# EAGLE board ECU_Adapterplatine (EAGLE 7.7.0)
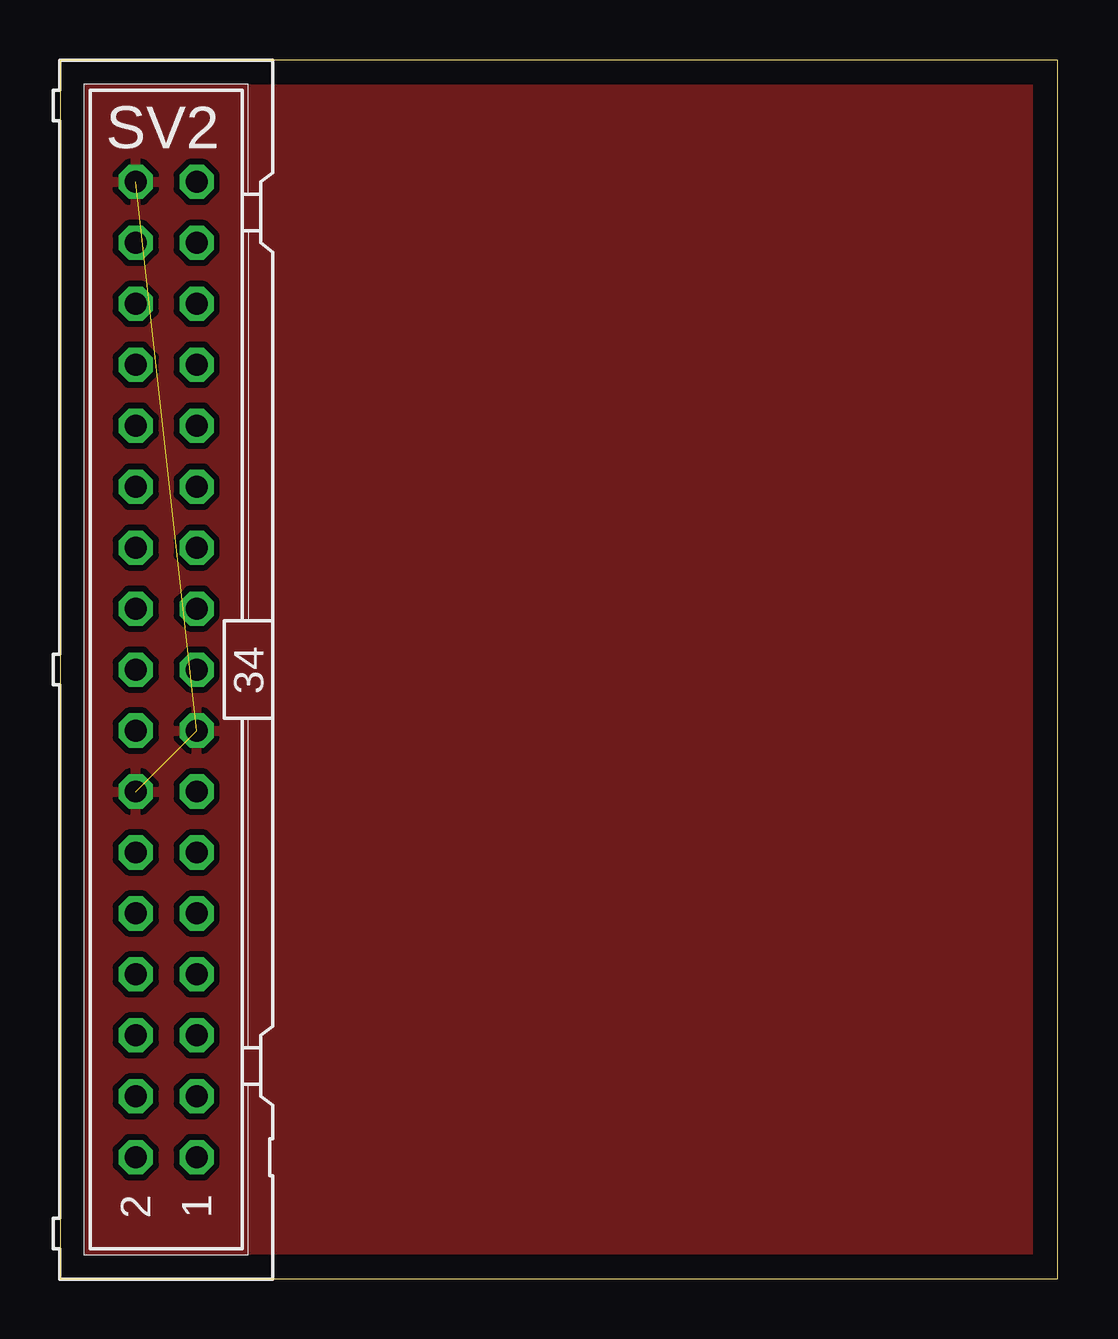
[diagram p0: board, top side]
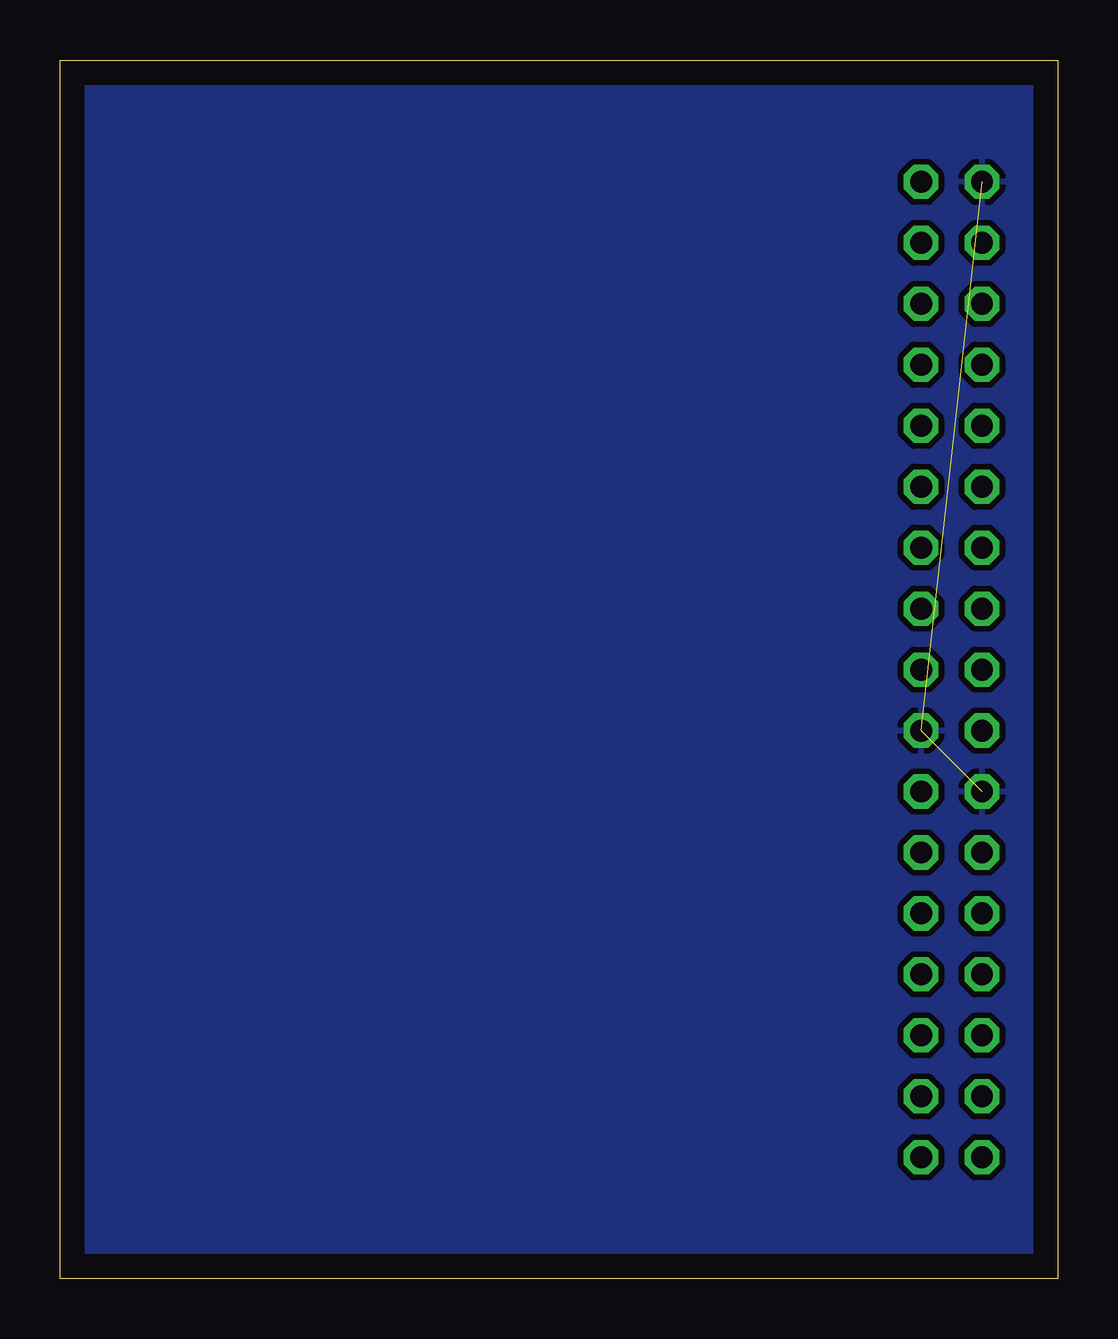
[diagram p1: board, bottom side, seen from below]

Size 41.57 x 50.79 mm. Coordinates in mm from the lower left corner, seen from the top.
Outline: 41.57,50.79 0,50.79 0,0 41.57,0 41.57,50.79
Copper layers (1*16): Top 0.035mm / dielectric 1.5mm / Bottom 0.035mm
Design rules "default": minimum track width 10mil, minimum drill 24mil, track to track 8mil, track to pad 8mil, pad to pad 8mil, via to via 8mil, smd to smd 8mil, copper to edge 40mil, drill to drill 8mil, minimum pad ring 10mil, minimum via ring 8mil, stop-mask expansion 4mil, vias tented up to drill 0mil, thermal gap 10mil

## Footprints (pad centres in the part's own frame; a part is rotated, then mirrored left to right if it is on the bottom)
ML34 = drill 0.914 octagon: 1 -20.32,-1.27; 2 -20.32,1.27; 3 -17.78,-1.27; 4 -17.78,1.27; 5 -15.24,-1.27; 6 -15.24,1.27; 7 -12.7,-1.27; 8 -12.7,1.27; 9 -10.16,-1.27; 10 -10.16,1.27; 11 -7.62,-1.27; 12 -7.62,1.27; 13 -5.08,-1.27; 14 -5.08,1.27; 15 -2.54,-1.27; 16 -2.54,1.27; 17 0,-1.27; 18 0,1.27; 19 2.54,-1.27; 20 2.54,1.27; 21 5.08,-1.27; 22 5.08,1.27; 23 7.62,-1.27; 24 7.62,1.27; 25 10.16,-1.27; 26 10.16,1.27; 27 12.7,-1.27; 28 12.7,1.27; 29 15.24,-1.27; 30 15.24,1.27; 31 17.78,-1.27; 32 17.78,1.27; 33 20.32,-1.27; 34 20.32,1.27

## Placement (x,y rotation side)
SV2  [ML34]  4.43,25.39 90 top

## Library data of the parts
SV2 = con-harting-ml

## Nets
+5V: SV2.13
+12V: SV2.33
AREF: SV2.16
GND: SV2.14 SV2.15 SV2.34
N$12: SV2.18
N$40: SV2.29
N$41: SV2.31
N$44: SV2.32
N$45: SV2.30
PB0: SV2.27
PB1: SV2.28
PB2: SV2.26
PB3: SV2.24
PB4: SV2.22
PB5: SV2.20
PB6: SV2.17
PB7: SV2.19
PC0: SV2.12
PC1: SV2.10
PC2: SV2.8
PC3: SV2.6
PC4: SV2.4
PC5: SV2.2
PC6: SV2.1
PD0: SV2.3
PD1: SV2.5
PD2: SV2.7
PD3: SV2.9
PD4: SV2.11
PD5: SV2.21
PD6: SV2.23
PD7: SV2.25

## Tracks (layer width: path | path; a pad name or v marks a point on that pad's centre or on a via)
GND  (2 unrouted)
  pour Top (isolate 0.254): 41.57,0.3 -0.02,0.3 -0.02,50.79 41.57,50.79
  pour Bottom (isolate 0.254): 41.57,-0.01 -0.02,-0.01 -0.02,50.79 41.57,50.79